# Altium PCB ControlUnit.PcbDoc (part 1 of 2)
Units mm, origin at the board's own origin, x right, y up, seen from the top; angles counter-clockwise.
Board outline 168.75 x 59.75 mm, 4 copper layers (Top Layer, GND, VCC, Bottom Layer), stack 1.536 mm thick; 143 components, 128 nets, 538 pads, 141 vias.
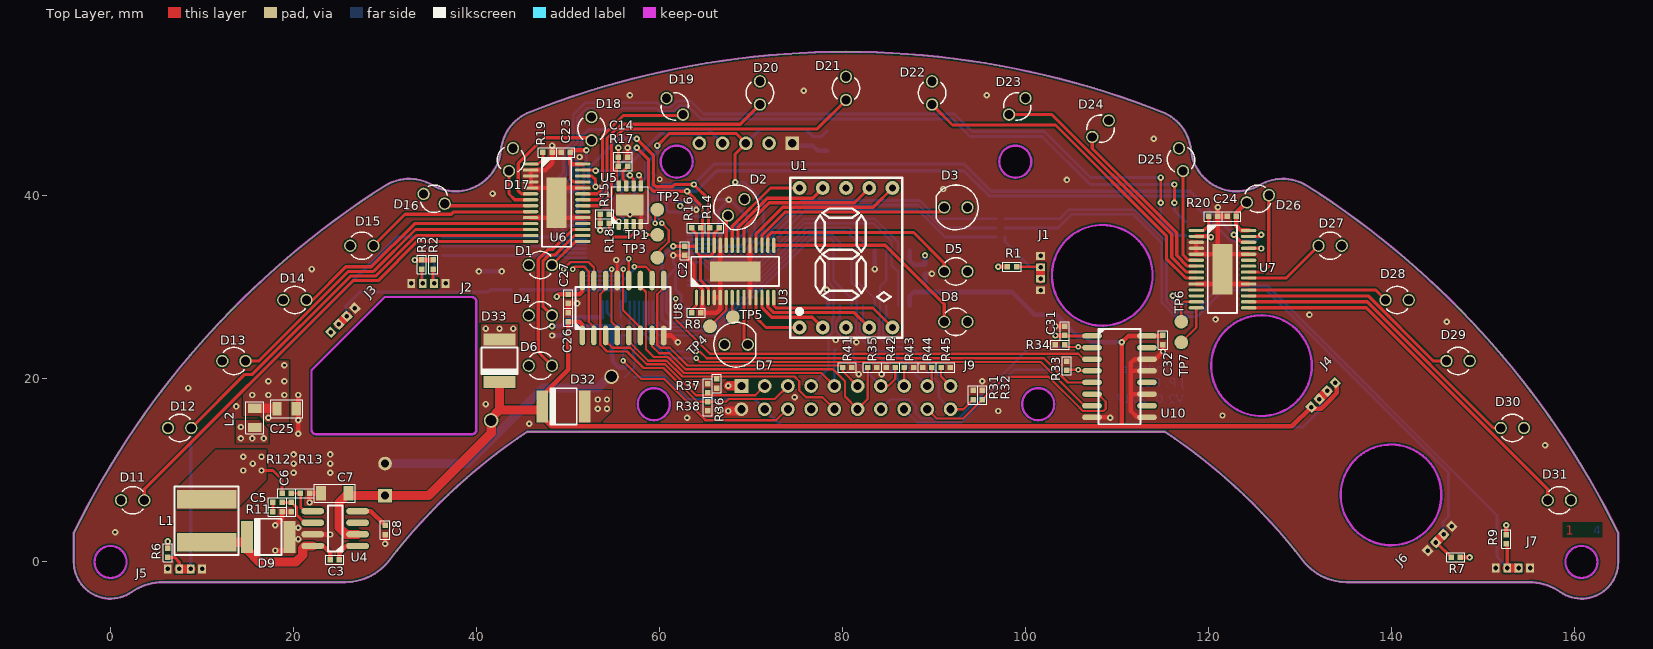
[diagram p0: Top Layer view]
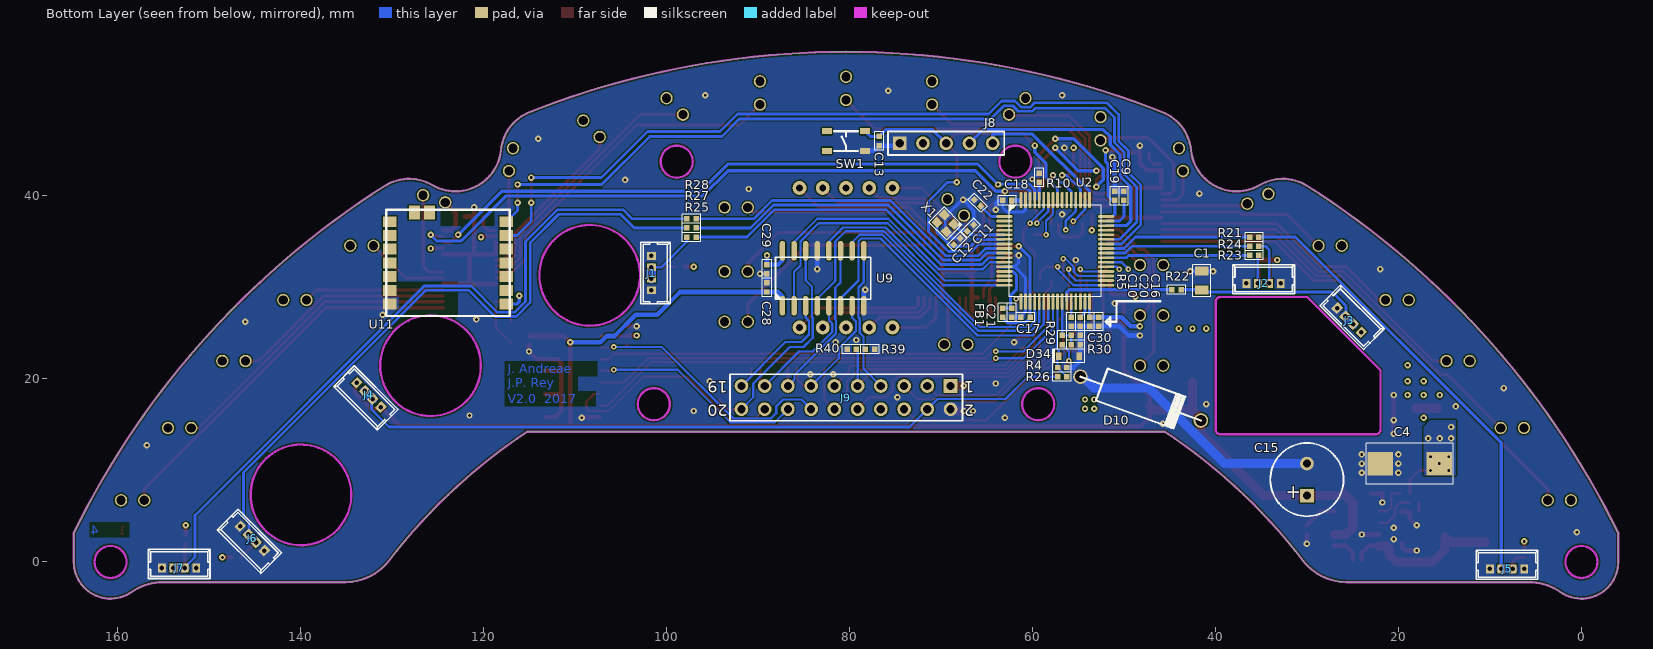
[diagram p1: Bottom Layer view, seen from below]
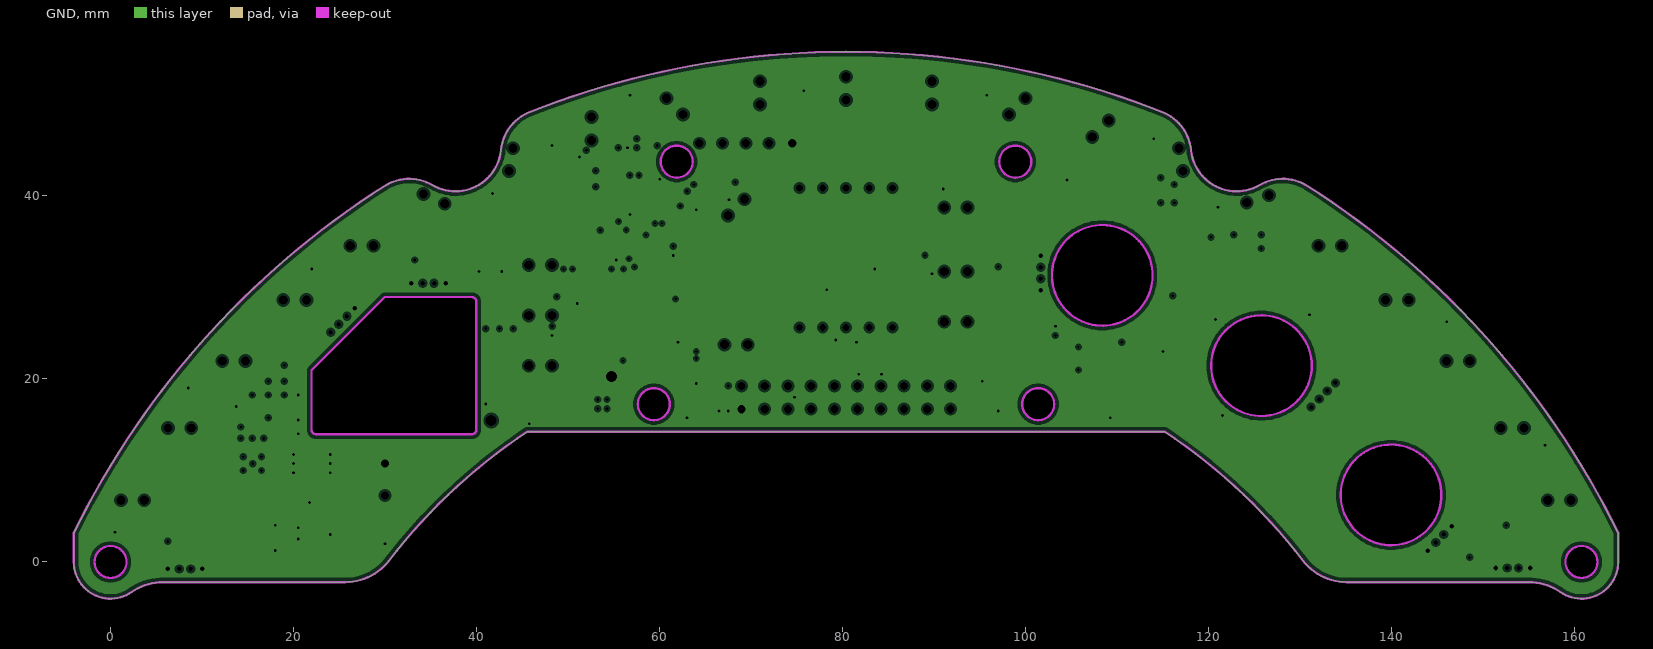
[diagram p2: GND, clearances drawn from the general rule]
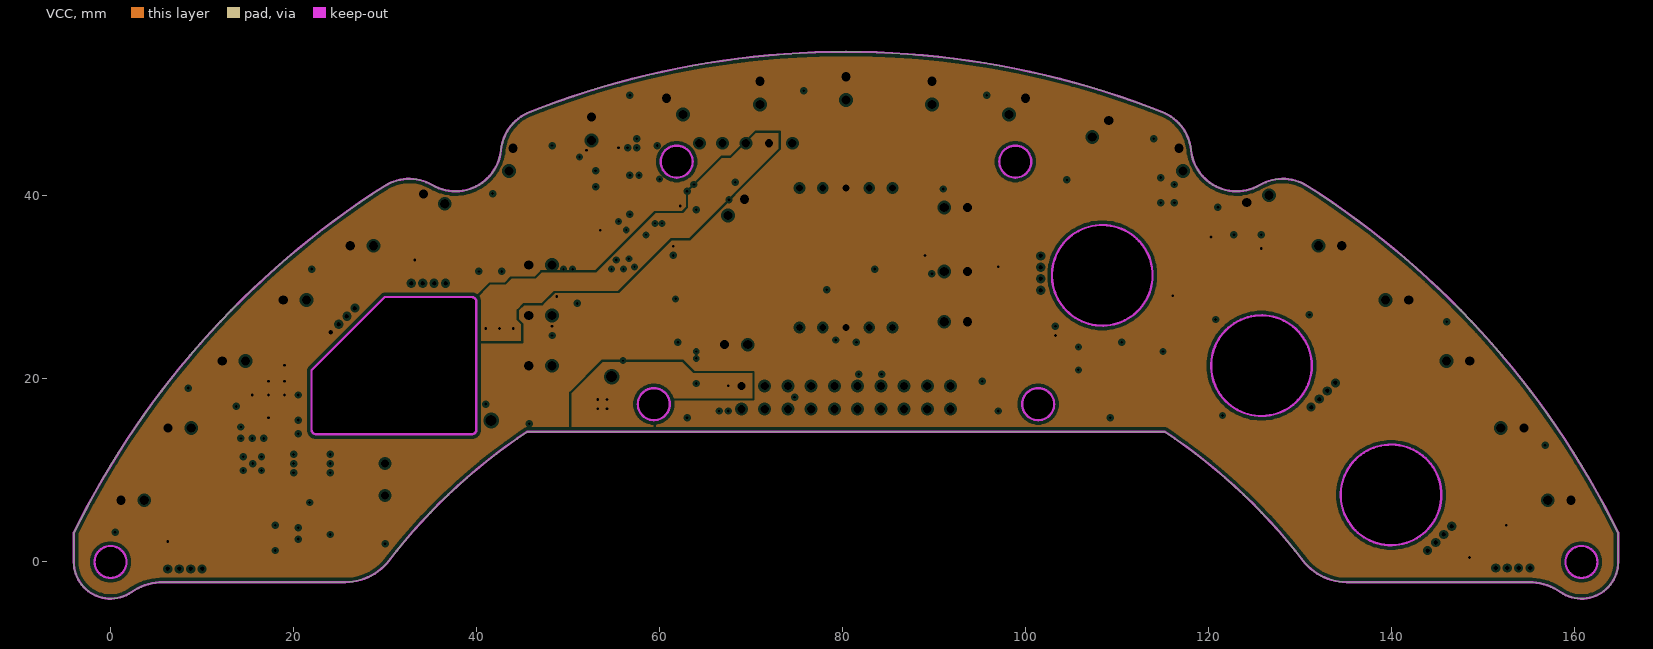
[diagram p3: VCC, clearances drawn from the general rule]
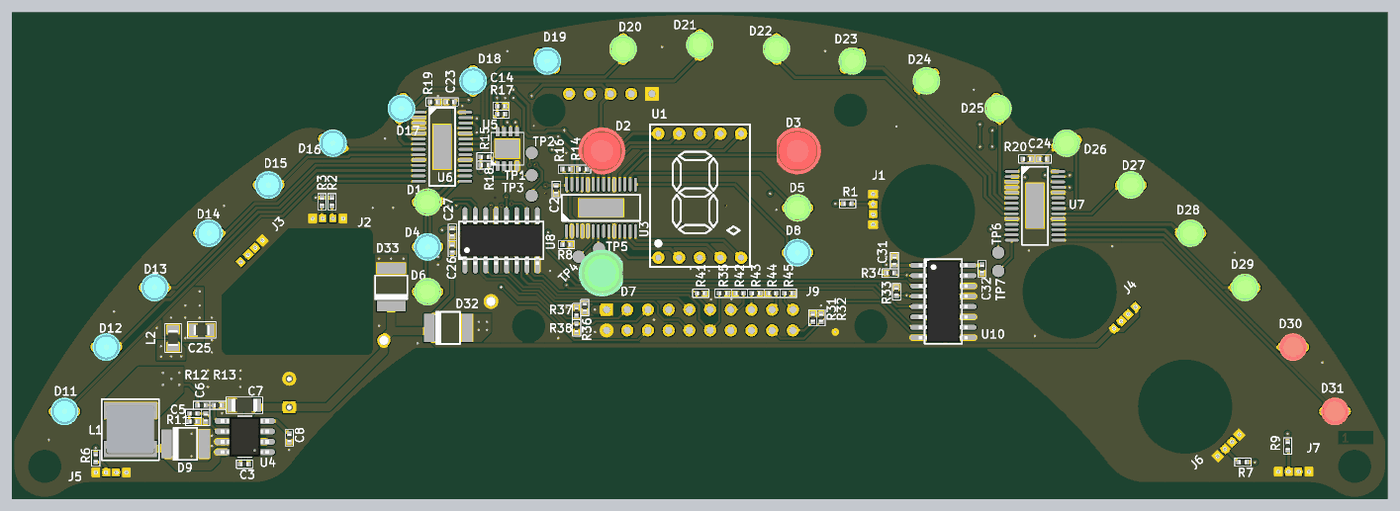
[diagram p5: 3D render of the assembled board from above, using the file's embedded part models]
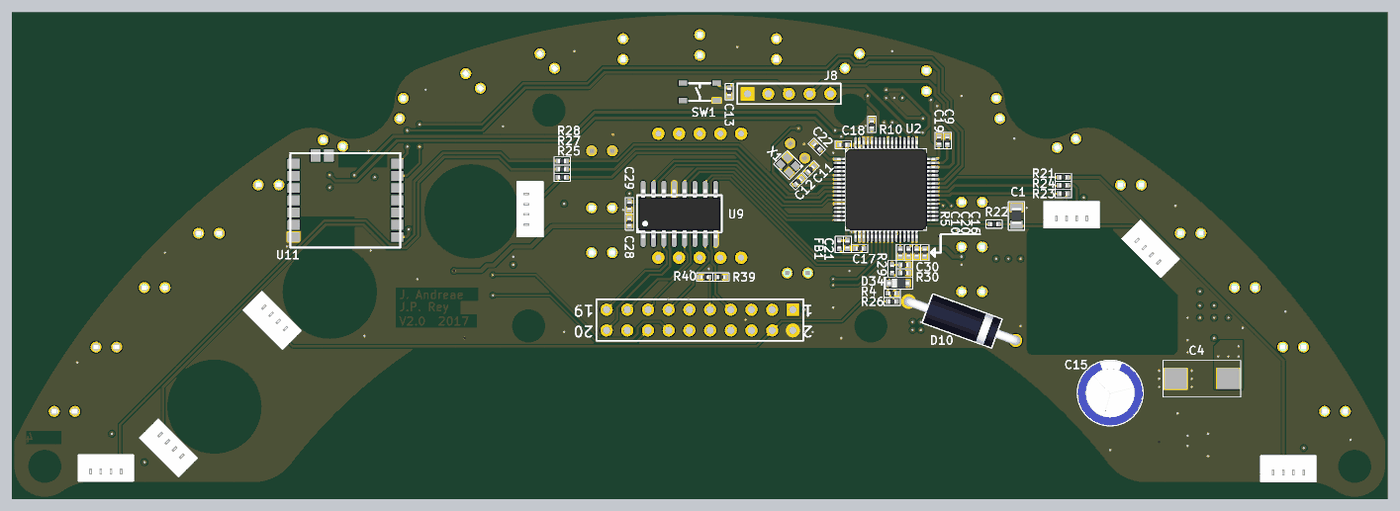
[diagram p6: 3D render of the assembled board from below, using the file's embedded part models]

## Layer stack, top to bottom
Top Solder: solder mask 0.0102, Solder Resist, Dk 3.5
Top Layer: signal copper 0.018
Dielectric1: prepreg 0.36, FR-4, Dk 4.2
GND: plane copper 0.035, net GND
Dielectric 4: core 0.71, Dk 4.2
VCC: plane copper 0.035, net (Multiple Nets)
Dielectric3: prepreg 0.36, FR-4, Dk 4.2
Bottom Layer: signal copper 0.018
Bottom Solder: solder mask 0.0102, Solder Resist, Dk 3.5

## Board outline
-4.011,0 ccw(c0,0) 2.299,-3.286 cw(c5.739,-8.203) 5.739,-2.203 25.661,-2.203 ccw(c25.661,3.797) 30.418,0.141 cw(c80.365,-38.256) 45.54,14.244 115.189,14.244 cw(c80.365,-38.256) 130.312,0.141 ccw(c135.069,3.797) 135.069,-2.203 154.991,-2.203 cw(c154.991,-8.203) 158.431,-3.286 ccw(c160.73,0) 164.74,0 164.74,3.178 ccw(c80.365,-38.256) 130.77,41.088 ccw(c128.089,36.867) 125.564,41.183 cw(c123.04,45.499) 118.064,45.004 ccw(c113.089,44.51) 114.927,49.16 ccw(c80.365,-38.256) 80.365,55.744 ccw(c80.365,-38.256) 45.802,49.16 ccw(c47.641,44.51) 42.665,45.004 cw(c37.69,45.499) 35.165,41.183 ccw(c32.641,36.867) 29.96,41.088 ccw(c80.365,-38.256) -4.011,3.178
cut-out: 57.615,17.244 ccw(c59.365,17.244) 59.365,15.494 ccw(c59.365,17.244) 61.115,17.244 ccw(c59.365,17.244) 59.365,18.994 ccw(c59.365,17.244)
cut-out: 61.865,41.994 cw(c61.865,43.744) 60.115,43.744 cw(c61.865,43.744) 61.865,45.494 cw(c61.865,43.744) 63.615,43.744 cw(c61.865,43.744)
cut-out: 97.115,43.744 ccw(c98.865,43.744) 98.865,41.994 ccw(c98.865,43.744) 100.615,43.744 ccw(c98.865,43.744) 98.865,45.494 ccw(c98.865,43.744)
cut-out: 99.615,17.244 ccw(c101.365,17.244) 101.365,15.494 ccw(c101.365,17.244) 103.115,17.244 ccw(c101.365,17.244) 101.365,18.994 ccw(c101.365,17.244)
cut-out: 102.865,31.322 ccw(c108.365,31.322) 108.365,25.822 ccw(c108.365,31.322) 113.865,31.322 ccw(c108.365,31.322) 108.365,36.822 ccw(c108.365,31.322)
cut-out: 120.258,21.448 ccw(c125.758,21.448) 125.758,15.948 ccw(c125.758,21.448) 131.258,21.448 ccw(c125.758,21.448) 125.758,26.948 ccw(c125.758,21.448)
cut-out: 134.422,7.328 ccw(c139.922,7.328) 139.922,1.828 ccw(c139.922,7.328) 145.422,7.328 ccw(c139.922,7.328) 139.922,12.828 ccw(c139.922,7.328)
cut-out: 158.98,0 ccw(c160.73,0) 160.73,-1.75 ccw(c160.73,0) 162.48,0 ccw(c160.73,0) 160.73,1.75 ccw(c160.73,0)
cut-out: 0,-1.75 cw(c0,0) -1.75,0 cw(c0,0) 0,1.75 cw(c0,0) 1.75,0 cw(c0,0)
cut-out: 22.472,13.948 cw(c22.472,14.448) 21.972,14.448 21.972,20.948 29.972,28.948 39.472,28.948 cw(c39.472,28.448) 39.972,28.448 39.972,14.448 cw(c39.472,14.448) 39.472,13.948

## Design rules (kind name [scope] priority, off if disabled: settings)
Clearance Clearance_1 [InNetClass('HV_NET') vs not InNetClass('HV_NET')] p1: gap=1.9 ignorepadtopadclearanceinfootprint=FALSE except(0: Arc-Hole Track-Hole SMDPad-Hole THPad-Hole Via-Hole Fill-Hole Poly-Hole Region-Hole Text-Hole)
Clearance [All] p2: gap=0.15 ignorepadtopadclearanceinfootprint=FALSE except(0: Arc-Hole Track-Hole SMDPad-Hole THPad-Hole Via-Hole Fill-Hole Poly-Hole Region-Hole Text-Hole)
ComponentClearance [All] p1: gap=0.05 collisioncheckmode=3 verticalgap=0.05 showdistances=FALSE
FabricationTestPointUsage TestPointUsage [All] p1: valid=0 allowmultiple=FALSE
FabricationTestpoint Testpoint [All] p1: side=3 testpointundercomponent=TRUE minsize=1.016 maxsize=2.54 preferedsize=1.524 minholesize=0 maxholesize=1.016 preferedholesize=0.813 testpointgrid=0.025 allowsidetop=TRUE allowsidebottom=TRUE usegrid=TRUE gridtolerance=0
Height [All] p1: minheight=0 maxheight=30 prefheight=12.7
HoleSize [All] p1: absolutevalues=TRUE maxlimit=5 minlimit=0.15 maxpercent=80.000 minpercent=20.000
HoleToHoleClearance [All] p1: gap=0.3 allowstackedmicrovias=TRUE
MatchedLengths [All] p1: tolerance=1.5 checknetsindiffpair=TRUE checkdiffpairvsdiffpair=FALSE checkxsignals=FALSE checkothers=FALSE
MaxMinImpedance [InNetClass('50ohm_line')] p1: minimum=40.00 maximum=60.00
MinimumSolderMaskSliver [All] p1: minsoldermaskwidth=0.01
NetAntennae [All] p1 off: netantennaetolerance=0
PlaneClearance [All] p1: clearance=0.254
PlaneConnect [All] p1: planeconnectstyle=Direct reliefexpansion=0.508 reliefentries=4 reliefconductorwidth=0.254 reliefairgap=0.254
PolygonConnect no_thermal_relief [IsNamedPolygon('NO_THERM_PLANE')] p1: connectstyle=Direct reliefconductorwidth=0.2 reliefentries=4 polygonreliefangle="90 Angle" airgapwidth=0.1
PolygonConnect [All] p2: connectstyle=Relief reliefconductorwidth=0.2 reliefentries=4 polygonreliefangle="90 Angle" airgapwidth=0.1
RoutingVias [All] p1: holewidth=0.3 width=0.7 viastyle="Through Hole" minholewidth=0.15 minwidth=0.35 maxholewidth=5 maxwidth=7
SilkToBoardRegionClearance [All] p1 off:
SilkToSilkClearance [All] p1 off: silktosilkclearance=0.254
SilkToSolderMaskClearance SilkscreenOverComponentPads [IsPad] p1 off: minsilkscreentomaskgap=0.254 clearancetoexposedcopper=TRUE
SolderMaskExpansion [All] p1: expansion=0.102
Width [All] p1: maxlimit=10 minlimit=0.2 preferedwidth=0.3
17 further rules are at their usual default settings.

## Classes and differential pairs
component class U_MCU: C1 C2 C3 C4 C5 C6 C7 C8 C9 C10 C11 C12 C13 C14 C15 C16 C17 C18 C19 C20 C21 C22 C25 C26 C27 C28 C29 C30 C31 C32 D1 D2 D3 D4 D5 D6 D7 D8 D9 D10 D32 D33 D34 FB1 J1 J2 J3 J4 J5 J6 J7 J8 J9 L1 L2 R1 R2 R3 R4 R5 R6 R7 R8 R9 R10 R11 R12 R13 R14 R15 R16 R17 R18 R21 R22 R23 R24 R25 R26 R27 R28 R29 R30 R31 R32 R33 R34 R35 R36 R37 R38 R39 R40 R41 R42 R43 R44 R45 SW1 TP1 TP2 TP3 TP4 TP5 U1 U2 U3 U4 U5 U8 U9 U10 U11 X1
component class U_LEDs: C23 C24 D11 D12 D13 D14 D15 D16 D17 D18 D19 D20 D21 D22 D23 D24 D25 D26 D27 D28 D29 D30 D31 R19 R20 TP6 TP7 U6 U7

## Components (designator, comment, footprint, x,y, rotation, side; value= is the part's Value field where it differs from the comment)
C1 "22u" 0805_ 41.5,30.75 r180 bottom
C2 "100n" 0402_ 62.75,34 r180 top
C3 "100n" 0402_ 24.5,0.25 r270 top
C4 "C" 2917 18.75,10.75 r0 bottom value=470u
C5 "C" 0402_ 18.25,6.5 r90 top value=220pF
C6 "C" 0402_ 19.75,6 r180 top value=220pF
C7 "10u" 1206_ 24.5,7.5 r0 top
C8 "100n" 0402_ 30,3.5 r180 top
C9 "2u2" 0402_ 50,40 r0 bottom
C10 "2u2" 0402_ 54.75,26.25 r180 bottom
C11 "18p" 0402_ 66.75,36.5 r45 bottom
C12 "18p" 0402_ 68.25,35 r45 bottom
C13 "100n" 0402_ 76.75,46 r0 bottom
C14 "100n" 0402_ 56,44.25 r270 top
C15 "C_pol" C_pol8x12mm 30,7.25 r0 bottom value=100u
C16 "4u7" 0402_ 52.75,26.25 r0 bottom
C17 "100n" 0402_ 60.75,26.75 r90 bottom
C18 "100n" 0402_ 62.75,39.5 r90 bottom
C19 "100n" 0402_ 51,40 r180 bottom
C20 "100n" 0402_ 53.75,26.25 r0 bottom
C21 "100n" 0402_ 62.25,27.25 r0 bottom
C22 "100n" 0402_ 66,39.25 r135 bottom
C23 "100n" 0402_ 49.75,44.75 r90 top
C24 "100n" 0402_ 122.5,37.75 r90 top
C25 "22u" 0805_ 19.25,16.75 r270 top
C26 "100n" 0402_ 50,26.75 r180 top
C27 "100n" 0402_ 50,28.75 r180 top
C28 "100n" 0402_ 89,30 r0 bottom
C29 "100n" 0402_ 89,32 r0 bottom
C30 "4u7" 0402_ 55.25,24.75 r270 bottom
C31 "100n" 0402_ 104.25,25.25 r180 top
C32 "100n" 0402_ 115,24.25 r180 top
D1 "led" LED3MM_GREEN 46.972,32.448 r0 top locked
D2 "led" LED5MM_RED 68.365,38.744 r225 top locked
D3 "led" LED5MM_RED 92.365,38.744 r180 top locked
D4 "led" LED3MM_BLUE 46.972,26.948 r0 top locked
D5 "led" LED3MM_GREEN 92.365,31.744 r180 top locked
D6 "led" LED3MM_GREEN 46.972,21.448 r0 top locked
D7 "led" LED5MM_GREEN 68.365,23.744 r0 top locked
D8 "led" LED3MM_BLUE 92.365,26.244 r180 top locked
D9 "STPS3L40" SMB_FLAT 17.25,2.75 r180 top
D10 "Zener" 1N5354 54.75,20.25 r200 bottom
D11 "led" LED3MM_BLUE 2.423,6.742 r0 top locked
D12 "led" LED3MM_BLUE 7.553,14.643 r0 top locked
D13 "led" LED3MM_BLUE 13.482,21.962 r0 top locked
D14 "led" LED3MM_BLUE 20.143,28.625 r0 top locked
D15 "led" LED3MM_BLUE 27.464,34.554 r0 top locked
D16 "led" LED3MM_BLUE 35.365,39.685 r335 top locked
D17 "led" LED3MM_BLUE 43.759,43.961 r260 top locked
D18 "led" LED3MM_BLUE 52.553,47.339 r270 top locked
D19 "led" LED3MM_BLUE 61.653,49.778 r315 top locked
D20 "led" LED3MM_GREEN 70.957,51.251 r270 top locked
D21 "led" LED3MM_GREEN 80.365,51.744 r270 top locked
D22 "led" LED3MM_GREEN 89.772,51.251 r270 top locked
D23 "led" LED3MM_GREEN 99.077,49.778 r225 top locked
D24 "led" LED3MM_GREEN 108.176,47.339 r225 top locked
D25 "led" LED3MM_GREEN 116.971,43.963 r280 top locked
D26 "led" LED3MM_GREEN 125.365,39.687 r18 top locked
D27 "led" LED3MM_GREEN 133.266,34.554 r180 top locked
D28 "led" LED3MM_GREEN 140.587,28.627 r180 top locked
D29 "led" LED3MM_GREEN 147.248,21.964 r180 top locked
D30 "led" LED3MM_RED 153.176,14.643 r180 top locked
D31 "led" LED3MM_RED 158.307,6.744 r180 top locked
D32 "STPS3L40" SMB_FLAT 49.5,17 r180 top
D33 "STPS3L40" SMB_FLAT 42.5,22 r270 top
D34 "BZX384-C3V0" SOD323 56,22.5 r90 bottom
FB1 "FB" 0402_ 63.25,27.25 r180 bottom
J1 "MOLEX_embase_4_voies" MOLEX53047-0410 101.635,29.694 r90 bottom locked
J2 "MOLEX_embase_4_voies" MOLEX53047-0410 32.86,30.444 r0 bottom locked
J3 "MOLEX_embase_4_voies" MOLEX53047-0410 24.058,25.093 r45 bottom locked
J4 "MOLEX_embase_4_voies" MOLEX53047-0410 133.837,19.571 r225 bottom locked
J5 "MOLEX_embase_4_voies" MOLEX53047-0410 6.26,-0.756 r0 bottom
J6 "MOLEX_embase_4_voies" MOLEX53047-0410 146.562,3.896 r225 bottom locked
J7 "MOLEX_embase_4_voies" MOLEX53047-0410 151.36,-0.656 r0 bottom locked
J8 "Header 5" HDR1X5 74.5,45.75 r180 bottom value="SWD Port"
J9 "Header 10X2" header2x10 80.365,17.964 r0 bottom locked
L1 "L" SRN6028 10.5,4.5 r90 top value=15uH
L2 "Inductor" 0805_ 15.75,15.75 r0 top value=1u
R1 "1k" 0402_ 98.5,32.25 r90 top
R2 "1k" 0402_ 35.25,32.5 r0 top
R3 "1k" 0402_ 34,32.5 r0 top
R4 "3k3" 0402_ 56.75,21.25 r90 bottom
R5 "10k" 0402_ 55.75,26.25 r0 bottom
R6 "1k" 0402_ 6.25,1 r180 top
R7 "1k" 0402_ 147,0.5 r270 top
R8 "3k" 0402_ 64,27.25 r90 top
R9 "1k" 0402_ 152.5,2.5 r0 top
R10 "10k" 0402_ 59.25,42 r180 bottom
R11 "27k" 0402_ 18.25,5.5 r270 top
R12 "10k" 0402_ 19.25,7.5 r90 top
R13 "3k3" 0402_ 21.25,7.5 r90 top
R14 "10k" 0402_ 66,36.5 r90 top
R15 "10k" 0402_ 54,38 r270 top
R16 "10k" 0402_ 64,36.5 r270 top
R17 "10k" 0402_ 56,43.25 r270 top
R18 "10k" 0402_ 54,37 r270 top
R19 "3k" 0402_ 47.75,44.75 r90 top
R20 "3k" 0402_ 120.5,37.75 r90 top
R21 "330R" 0402_ 35.75,35.5 r90 bottom
R22 "330R" 0402_ 44.25,29.75 r270 bottom
R23 "330R" 0402_ 35.75,33.5 r90 bottom
R24 "330R" 0402_ 35.75,34.5 r90 bottom
R25 "330R" 0402_ 97.25,35.5 r270 bottom
R26 "8k2" 0402_ 56.75,20.25 r90 bottom
R27 "330R" 0402_ 97.25,36.5 r270 bottom
R28 "330R" 0402_ 97.25,37.5 r270 bottom
R29 "1k8" 0402_ 56.75,24.25 r180 bottom
R30 "3k3" 0402_ 55.25,23.75 r270 bottom
R31 "10k" 0402_ 94.25,18.25 r180 top
R32 "10k" 0402_ 95.25,18.25 r180 top
R33 "10k" 0402_ 104.5,21.448 r180 top
R34 "10k" 0402_ 103.75,23.75 r270 top
R35 "10k" 0402_ 83.25,21.25 r90 top
R36 "10k" 0402_ 66.25,19.5 r0 top
R37 "10k" 0402_ 65.25,19 r180 top
R38 "10k" 0402_ 65.25,17 r0 top
R39 "10k" 0402_ 77.75,23.25 r90 bottom
R40 "10k" 0402_ 79.75,23.25 r270 bottom
R41 "10k" 0402_ 80.5,21.25 r90 top
R42 "10k" 0402_ 85.25,21.25 r270 top
R43 "10k" 0402_ 87.25,21.25 r90 top
R44 "10k" 0402_ 89.25,21.25 r270 top
R45 "10k" 0402_ 91.25,21.25 r90 top
SW1 "switch" microswitch_PTS810 80.365,46 r180 bottom
TP1 "TP" TP_PogoPin 59.75,35.75 r0 top
TP2 "TP" TP_PogoPin 59.75,38.5 r90 top
TP3 "TP" TP_PogoPin 59.75,33.25 r90 top
TP4 "TP" TP_PogoPin 65.5,25.75 r90 top
TP5 "TP" TP_PogoPin 68,26.75 r90 top
TP6 "TP" TP_PogoPin 117,26.25 r90 top
TP7 "TP" TP_PogoPin 117,24 r90 top
U1 "TDSR1350" TDSR1350 80.365,33.244 r0 top locked
U2 "STM32F205RxT" LQFP64 57.5,34 r180 bottom
U3 "PCA9952TW/Q900" HTSSOP28 68.25,31.75 r90 top
U4 "TPS54233" soic8 27,1.75 r180 top
U5 "MX25L1606E" USON_8L 56.75,39 r90 top
U6 "PCA9952TW/Q900" HTSSOP28 48.75,39.25 r0 top
U7 "PCA9952TW/Q900" HTSSOP28 121.5,32 r0 top
U8 "MC14504B" SOIC16 56,27.75 r90 top
U9 "MC14504B" SOIC16 82.865,31 r90 bottom
U10 "MC14504B" SOIC16 110.25,20.25 r0 top
U11 "SPBT2632C2A" SPBT2632C2A 123.85,32.675 r270 bottom
X1 "QUARTZ" FA_128 69.5,37 r45 bottom value=25MHz

## Footprints (in the part's own frame and the unit in brackets; to place one, negate y for a bottom-side part, rotate by r counter-clockwise, add the part's x,y. Pads: shape width x height; smd on the part's side, far side on the other; paste and mask are expansions set on the pad)
1N5354 [mm]
  round 1.6 hole 1.2: 1(0,0) 2(14,0)
  silkscreen extent 0,-1.85 14,1.85, body extent -0.54,-1.84 14.55,1.85, height 3.83
0402_ [mm] "SMD 0402 package, 0.6x1.5mm"
  rect 0.6x0.6 smd: 1(0,-0.5) 2(0,0.5)
  silkscreen extent -0.5,-1 0.5,1, body extent -0.25,-0.5 0.25,0.5, height 0.6
0805_ [mm] "standard 0805 FP"
  rect 1.5x1 smd: 1(0,-1.05) 2(0,1.05)
  silkscreen extent -1,-1.75 1,1.75, body extent -0.62,-1 0.63,1, height 1.2
1206_ [mm] "1206 1.6x3.2mm"
  rect 1.1x1.6 smd: 1(-1.5,0) 2(1.5,0)
  silkscreen extent -2.25,-1 2.25,1, body extent -1.6,-0.8 1.6,0.8, height 1.5
2917 [mm] "2917 7.3x4.3mm"
  rect 2.77x2.55 smd: 1(-3.22,0) 2(3.22,0)
  silkscreen extent -4.75,-2.25 4.75,2.25, body extent -3.65,-2.15 3.65,2.15, height 4.3
C_pol8x12mm [mm] "radial, diam 8mm, height 12mm"
  rect 1.5x1.5 hole 0.9: 1(0,0)
  round 1.5 hole 0.9: 2(0,-3.5)
  silkscreen extent -4,-5.75 4,2.25, body extent -4,-5.75 4,2.25, height 12
FA_128 [mm] "Crystal Unit Ultra Miniature Size Low Profile SMD MHz range"
  rect 0.95x0.85 smd: 1(-0.725,-0.575) 2(0.725,-0.575) 3(0.725,0.575) 4(-0.725,0.575)
  silkscreen extent -1.38,-1.18 1.38,1.18, body extent -1,-0.8 1,0.8, height 0.5
HDR1X5 [mm] "Connector; Header; 5 Position"
  rect 1.5x1.5 hole 0.9: 1(0,0)
  round 1.5 hole 0.9: 2(2.54,0) 3(5.08,0) 4(7.62,0) 5(10.16,0)
  silkscreen extent -1.27,-1.27 11.43,1.27
header2x10 [mm] "header 2x10 pins, path 2.54mm"
  rect 1.5x1.5 hole 0.9: 1(-11.43,-1.27)
  round 1.5 hole 0.9: 2(-11.43,1.27) 3(-8.89,-1.27) 4(-8.89,1.27) 5(-6.35,-1.27) 6(-6.35,1.27) 7(-3.81,-1.27) 8(-3.81,1.27) 9(-1.27,-1.27) 10(-1.27,1.27) 11(1.27,-1.27) 12(1.27,1.27) 13(3.81,-1.27) 14(3.81,1.27) 15(6.35,-1.27) 16(6.35,1.27) 17(8.89,-1.27) 18(8.89,1.27) 19(11.43,-1.27) 20(11.43,1.27)
  silkscreen extent -12.73,-2.54 12.67,2.54, body extent -16.5,-4.5 16.5,4.5, height 10
HTSSOP28 [mm] "TSOP, 128-Leads, Body 9.7x4.4mm, Pitch 0.65mm, IPC Medium Density"
  oval 1.7x0.35 smd: 1(-2.85,4.225) 2(-2.85,3.575) 3(-2.85,2.925) 4(-2.85,2.275) 5(-2.85,1.625) 6(-2.85,0.975) 7(-2.85,0.325) 8(-2.85,-0.325) 9(-2.85,-0.975) 10(-2.85,-1.625) 11(-2.85,-2.275) 12(-2.85,-2.925) 13(-2.85,-3.575) 14(-2.85,-4.225) 15(2.85,-4.225) 16(2.85,-3.575) 17(2.85,-2.925) 18(2.85,-2.275) 19(2.85,-1.625) 20(2.85,-0.975) 21(2.85,-0.325) 22(2.85,0.325) 23(2.85,0.975) 24(2.85,1.625) 25(2.85,2.275) 26(2.85,2.925) 27(2.85,3.575) 28(2.85,4.225)
  rect 2.2x5.5 smd: 10(0,0)
  silkscreen extent -1.6,-4.8 1.6,4.8, body extent -2.2,-4.85 2.2,4.85, height 1.2
LED3MM_BLUE [mm]
  round 1.35 hole 1: 1(-1.27,0) 2(1.27,0)
  silkscreen extent -1.15,-1.5 1.15,1.5, body extent -1.7,-1.7 1.7,1.7, height 8.64
LED3MM_GREEN [mm]
  round 1.35 hole 1: 1(-1.27,0) 2(1.27,0)
  silkscreen extent -1.15,-1.5 1.15,1.5, body extent -1.7,-1.7 1.7,1.7, height 8.64
LED3MM_RED [mm]
  round 1.35 hole 1: 1(-1.27,0) 2(1.27,0)
  silkscreen extent -1.15,-1.5 1.15,1.5, body extent -1.7,-1.7 1.7,1.7, height 8.64
LED5MM_GREEN [mm]
  round 1.35 hole 1: 1(-1.27,0) 2(1.27,0)
  silkscreen extent -2.44,-2.45 2.13,2.45, body extent -2.9,-2.9 2.55,2.9, height 12.44
LED5MM_RED [mm]
  round 1.35 hole 1: 1(-1.27,0) 2(1.27,0)
  silkscreen extent -2.44,-2.45 2.13,2.45, body extent -2.9,-2.9 2.55,2.9, height 12.44
LQFP64 [mm] "Thin QFP, 64-Leads, Body 10x10mm, Pitch 0.5mm, IPC Medium Density"
  oval 1.8x0.3 smd: 1(-5.55,3.75) 2(-5.55,3.25) 3(-5.55,2.75) 4(-5.55,2.25) 5(-5.55,1.75) 6(-5.55,1.25) 7(-5.55,0.75) 8(-5.55,0.25) 9(-5.55,-0.25) 10(-5.55,-0.75) 11(-5.55,-1.25) 12(-5.55,-1.75) 13(-5.55,-2.25) 14(-5.55,-2.75) 15(-5.55,-3.25) 16(-5.55,-3.75) 33(5.55,-3.75) 34(5.55,-3.25) 35(5.55,-2.75) 36(5.55,-2.25) 37(5.55,-1.75) 38(5.55,-1.25) 39(5.55,-0.75) 40(5.55,-0.25) 41(5.55,0.25) 42(5.55,0.75) 43(5.55,1.25) 44(5.55,1.75) 45(5.55,2.25) 46(5.55,2.75) 47(5.55,3.25) 48(5.55,3.75)
  oval 0.3x1.8 smd: 17(-3.75,-5.55) 18(-3.25,-5.55) 19(-2.75,-5.55) 20(-2.25,-5.55) 21(-1.75,-5.55) 22(-1.25,-5.55) 23(-0.75,-5.55) 24(-0.25,-5.55) 25(0.25,-5.55) 26(0.75,-5.55) 27(1.25,-5.55) 28(1.75,-5.55) 29(2.25,-5.55) 30(2.75,-5.55) 31(3.25,-5.55) 32(3.75,-5.55) 49(3.75,5.55) 50(3.25,5.55) 51(2.75,5.55) 52(2.25,5.55) 53(1.75,5.55) 54(1.25,5.55) 55(0.75,5.55) 56(0.25,5.55) 57(-0.25,5.55) 58(-0.75,5.55) 59(-1.25,5.55) 60(-1.75,5.55) 61(-2.25,5.55) 62(-2.75,5.55) 63(-3.25,5.55) 64(-3.75,5.55)
  silkscreen extent -5,-5 5,5, body extent -6,-6 6,6, height 1.6
microswitch_PTS810 [mm] "subminiature tact switch for SMT, case 4.6x3.2mm, total 5.2x3.2mm"
  rect 1.05x0.65 smd: 1(-2.075,1.075) 2(2.075,1.075) 3(-2.075,-1.075) 4(2.075,-1.075)
  silkscreen extent -1.3,-1.1 1.3,1.05, body extent -2.3,-1.6 2.3,1.6, height 2.5
MOLEX53047-0410 [mm] "EMBASE DROITE 4 VOIES"
  rect 0.85x1 hole 0.5: 1(3.75,0) 2(2.5,0) 3(1.25,0) 4(0,0)
  silkscreen extent -1.5,-2.05 5.25,1.15, body extent -1.5,-2.06 5.25,1.14, height 4.25
SMB_FLAT [mm] "SMB flat ST ECOPACK footprint, case 3.95x4.6mm"
  rect 1.3x3.5 smd: 1(-2.32,0) 2(2.32,0)
  silkscreen extent -1.45,-1.97 1.45,1.97, body extent -2.8,-1.97 2.8,1.97, height 1
SOD323 [mm] "SOD323F 1.8x1.35mm, total legth 2.7mm, lead width 0.4mm"
  rect 0.83x0.63 smd: 1(0,-1.11) 2(0,1.11)
  silkscreen extent -0.75,-1.75 0.75,1.75, body extent -0.68,-1.35 0.67,1.35, height 0.79
soic8 [mm] "soic8 CMS 8 leads, pitch 1.27mm"
  oval 2.5x0.7 smd: 1(0,0) 2(0,-1.27) 3(0,-2.54) 4(0,-3.81) 5(4.9,-3.81) 6(4.9,-2.54) 7(4.9,-1.27) 8(4.9,0)
  silkscreen extent 1.65,-4.41 3.25,0.6, body extent -0.55,-4.35 5.45,0.55, height 1.71
SOIC16 [mm] "case 10.3x4.55mm pitch 1.27mm 16 leads"
  oval 2.15x0.6 smd: 1(-3,4.445) 2(-3,3.175) 3(-3,1.905) 4(-3,0.635) 5(-3,-0.635) 6(-3,-1.905) 7(-3,-3.175) 8(-3,-4.445) 9(3,-4.445) 10(3,-3.175) 11(3,-1.905) 12(3,-0.635) 13(3,0.635) 14(3,1.905) 15(3,3.175) 16(3,4.445)
  silkscreen extent -2.3,-5.2 2.3,5.2, body extent -3,-5 3,5, height 1.76
SPBT2632C2A [mm] "ST Micro mini Bluetooth Module"
  rect 1.2x1.5 smd: 1(-4.5,-6.37) 2(-3,-6.37) 3(-1.5,-6.37) 4(0,-6.37) 5(1.5,-6.37) 6(3,-6.37) 7(4.5,-6.37) 8(4.5,6.37) 9(3,6.37) 10(1.5,6.37) 11(0,6.37) 12(-1.5,6.37) 13(-3,6.37) 14(-4.5,6.37)
  rect 1.5x1.2 smd: 15(-5.5,-2.02) 16(-5.5,-3.67)
  Top Layer pour cut-out: 2,-5.37 6,-5.37 6,1.13 2,1.13
  Top Layer pour cut-out: -6,-0.87 -4,-0.87 -4,5.13 -6,5.13
  silkscreen extent -5.8,-6.75 5.8,6.75, body extent -6.11,-6.98 5.7,6.98, height 2.9
SRN6028 [mm] "Bourns Unshielded Wirewound Inductor"
  rect 2x6.5 smd: 1(-2.35,0) 2(2.35,0)
  silkscreen extent -3.75,-3.5 3.75,3.5, body extent -3,-3 3,3, height 2.9
TDSR1350 [mil] "Common Anode 7 seg led display"
  round 60 hole 30: 1(-200,-300) 2(-100,-300) 3(0,-300) 4(100,-300) 5(200,-300) 6(200,300) 7(100,300) 8(0,300) 9(-100,300) 10(-200,300)
  silkscreen extent -240,-344 242,345, body extent -239,-344 243,345, height 276
TP_PogoPin [mm] "Test point for Pogo pin contact"
  round 1.5 smd: 1(0,0)
  body extent -0.74,-0.75 0.75,0.75, height 0
USON_8L [mm] "USON 8L 4x4x0.6mm, LEAD PITCH 0.8MM"
  rrect50% 1.2x0.5 smd: 1(-2.1,1.2) 2(-2.1,0.4) 3(-2.1,-0.4) 4(-2.1,-1.2) 5(2.1,-1.2) 6(2.1,-0.4) 7(2.1,0.4) 8(2.1,1.2)
  rect 2.3x3 smd: 9(0,0)
  silkscreen extent -2,-2 2,2, body extent -2.02,-2 2.02,2, height 0.6

## Part data
C1 C25: library part C, Manufacturer=Murata, Manufacturer PartNum=GRM21BR61A226ME51L, rated voltage=10V, Digikey ref=490-10511-1-ND
C2 C3 C8 C13 C14 C17 C18 C19 C20 C21 C22 C23 C24 C26 C27 C28 C29 C31 C32: library part C, Manufacturer="TDK Corp", Manufacturer PartNum=C1005X5R1E104K050BC, Digikey ref=445-4964-1-ND
C4: Manufacturer=Kemet, Manufacturer PartNum=T495X477K010ATE100, Voltage=10V, Digikey ref=399-10524-1-ND
C5 C6: Manufacturer=Samsung, Manufacturer PartNum=CL05B221KB5NNNC, Digikey ref=1276-1531-1-ND
C7: library part C, Manufacturer=Samsung, Manufacturer PartNum=CL31A106KBHNNNE, rated voltage=50V, Digikey ref=1276-2876-1-ND
C9 C10 C11 C12 C16 C30: library part C
  C9 C10: Digikey ref=1276-1463-1-ND
  C11 C12: Digikey ref=490-5858-1-ND
  C16 C30: Digikey ref=490-5915-1-ND
C15: Manufacturer=Nichicon, Manufacturer PartNum=UVR1H101MPD1TD, rated voltage=50V, Digikey ref=493-5916-1-ND
D1 D5 D6 D20 D21 D22 D23 D24 D25 D26 D27 D28 D29: color_diam=green3mm, Manufacturer=Kingbright, Manufacturer PartNum=WP710A10LZGCK, Digikey ref=754-1915-ND, Type="GREEN, 2.65V/2mA/1100mcd/3mm"
D2 D3: color_diam=red5mm, Manufacturer="Cree Inc", Manufacturer PartNum=C503B-RCN-CW0Z0AA1, Digikey ref=C503B-RCN-CW0Z0AA1-ND, Type="RED, 2.1V/20mA/7500mcd/5mm"
D4 D8 D11 D12 D13 D14 D15 D16 D17 D18 D19: color_diam=blue3mm, Manufacturer=Wuerth, Manufacturer PartNum=151033BS03000, Digikey ref=732-5011-ND, Type="BLUE, 2.8V/20mA/3800mcd/3mm"
D7: color_diam=green5mm, Manufacturer=Kingbright, Manufacturer PartNum=WP7113LZGCK, Digikey ref=754-1920-ND, Type="GREEN, 2.65V/2mA/3000mcd/5mm"
D9 D32 D33: Manufacturer=STMicroelectronics, Manufacturer PartNum=STPS3L40UF, Digikey ref=497-8036-1-ND, IFmax=3A, Vf@IFmax=0.5V
D10: Manufacturer="ON Semi", Manufacturer PartNum=1N5354BG, Digikey ref=1N5354BGOS-ND, Vz=17V
D30 D31: color_diam=red3mm, Manufacturer=Wuerth, Manufacturer PartNum=151033RS03000, Digikey ref=732-5013-ND, Type="RED, 2V/20mA/2600mcd/3mm"
D34: "DIODE ZENER 3V 300MW SOD323", Manufacturer=NXP, Manufacturer PartNum=BZX384-C3V0,115, Digikey ref=568-8043-1-ND, Vz=3.0V
J1 J2 J3 J4 J5 J6 J7: "53047-0410 MOLEX", Manufacturer=Molex, Manufacturer PartNum=0530470410, Digikey ref=WM1733-ND
J8: "Header, 5-Pin", Digikey ref=S1113E-20-ND, LatestRevisionDate=17-Jul-2002, LatestRevisionNote="Re-released for DXP Platform.", Publisher="Altium Limited", status="SMD, right angle"
J9: "Header, 10-Pin, Dual row", LatestRevisionDate=17-Jul-2002, LatestRevisionNote="Re-released for DXP Platform.", Publisher="Altium Limited"
L1: "15µH Unshielded Wirewound Inductor 1.8A 114 mOhm Max Nonstandard", current=1.8A, Manufacturer="Bourns Inc", Manufacturer PartNum=SRN6028-150M, Digikey ref=SRN6028-150MCT-ND
L2: current=1A, Manufacturer="Taiyo Yuden", Manufacturer PartNum=BRC2012T1R0M, Digikey ref=587-2903-1-ND, Farnell ref=1904336
R1 R2 R3 R6 R7 R9: library part R, Manufacturer="Rohm Semi", Manufacturer PartNum=MCR01MRTF1001, Digikey ref=RHM1.00KCDCT-ND
R4 R5 R10 R26 R29 R30 R31 R32 R33 R34 R35 R36 R37 R38 R39 R40 R41 R42 R43 R44 R45: library part R
  R5 R10 R31 R32 R33 R34 R35 R36 R37 R38 R39 R40 R41 R42 R43 R44 R45: Digikey ref=RR05P10.0KDCT-ND
R8 R19 R20: library part R, Manufacturer=Yageo, Manufacturer PartNum=RC0402FR-073KL, Digikey ref=311-3KLRCT-ND
R11: library part R, Manufacturer=Panasonic, Manufacturer PartNum=ERJ-2RKF2702X, Digikey ref=P27.0KLCT-ND
R12 R14 R15 R16 R17 R18: library part R, Manufacturer=Panasonic, Manufacturer PartNum=ERJ-2RKF1002X, Digikey ref=P10.0KLCT-ND
R13: library part R, Manufacturer=Panasonic, Manufacturer PartNum=ERJ-2RKF3301X, Digikey ref=P3.30KLCT-ND
R21 R22 R23 R24 R25 R27 R28: library part R, Manufacturer=Yageo, Manufacturer PartNum=RC0402JR-07330RL, Digikey ref=311-330JRCT-ND
U1: Manufacturer="Vishay Semi", Digikey ref=TDSR1350-ND, Manufacturer PartNum=TDSR1350
U3 U6 U7: Manufacturer=NXP, Manufacturer PartNum=PCA9952TW/Q900,118, Digikey ref=568-10954-1-ND, Farnell ref=*, status=*
U4: "Buck Switching Regulator IC Positive Adjustable 0.8V 1 Output 2A 8-SOIC (0.154\", 3.90mm Width)", Manufacturer="Texas Instruments", Manufacturer PartNum=TPS54233DR, Digikey ref=296-23902-1-ND
U5: "16M-BIT [x 1 / x 2] CMOS SERIAL FLASH, 4KB Sector Erase", Manufacturer=Macronix, Manufacturer PartNum=MX25L1606EZUI-12G, Digikey ref=1092-1056-ND, Note1="Leave thermal pad floating"
U8 U9 U10: "IC LEVEL SHIFTER HEX 16-SOIC", Manufacturer="On Semi", Manufacturer PartNum=MC14504BDG, Digikey ref=MC14504BDGOS-ND
FB1: Digikey ref=490-3999-1-ND
SW1: Digikey ref=CKN10502CT-ND
U2: Digikey ref=497-11154-ND
U11: Digikey ref=497-13189-ND
X1: Digikey ref=887-2000-1-ND, Farnell ref="1892193 (US)"

## Via types
v1: diameter 0.7, hole 0.3, Top Layer to Bottom Layer, tented both sides, 122 vias
v2: diameter 0.6, hole 0.25, Top Layer to Bottom Layer, tented both sides, 18 vias
v3: diameter 0.7, hole 0.3, Top Layer to Bottom Layer, tented bottom, 1 vias

## Nets (pads, with @x,y where several pads share a name; then routed paths per layer and width w, separated by ;. In a path a pad name is that pad's centre, name@x,y a point inside that pad or via, vN(x,y) a via of type N, cw(c..) or ccw(c..) an arc to the next point about the centre after c; other vN are vias at no path point)
3V3: C2.1 C14.1 C16.1 C17.1 C18.1 C19.1 C20.1 C23.1 C24.1 C25.1 C27.1 C29.1 C31.2 D1.1 D2.1 D3.1 D4.1 D5.1 D6.1 D7.1 D8.1 D11.1 D12.1 D13.1 D14.1 D15.1 D16.1 D17.1 D18.1 D19.1 D20.1 D21.1 D22.1 D23.1 D24.1 D25.1 D26.1 D27.1 D28.1 D29.1 D30.1 D31.1 FB1.1 J3.4 L2.2 R1.2 R2.2 R3.2 R6.1 R7.2 R9.2 R14.1 R15.1 R16.1 R17.1 R18.1 U1.3 U1.8 U2.19 U2.32 U2.48 U2.64 U3.3 U3.25 U3.28 U5.8 U6.25 U6.28 U7.2 U7.25 U7.28 U8.16 U9.16 U10.1 U11.8 | length 88.7
  Top Layer w0.3: R16.1@63.5,36.476 R16.1@63.5,36.5
  Top Layer w0.35: 50.25,43.5 50.25,41.85 50.575,41.525 U6.25@51.6,41.525 ; v1(53.5,36.25) R18.1@53.5,37 R15.1@53.5,38 ; v1(55.5,45.25) C14.1@55.5,44.25 R17.1@55.5,43.25 55.25,43 55.25,41.75 55.55,41.45 U5.8@55.55,41.1 ; v1(61.5,34.5) C2.1@62.75,34.5 U3.28@63.925,34.5 ; R16.1@63.5,36.476 63.5,36.375 64.025,35.85 U3.28@64.025,34.6 64.025,33.868 64.468,33.425 ; U3.3@65.325,28.9 65.325,29.925 64.468,30.782 64.468,33.425 ; R14.1@66.5,36.5 66.5,36.44 65.975,35.915 U3.25@65.975,34.6 65.975,33.868 65.532,33.425 64.468,33.425 ; C31.2@104.25,24.75 104.305,24.695 U10.1@107.25,24.695 ; U7.25@124.35,34.275 v1@125.725,34.275
  Top Layer w0.5: R6.1@6.25,1.5 v1(6.25,2.25) ; v1(33.25,33) R2.2@35.25,33 ; v1(48.75,29) 49,29.25 C27.1@50,29.25 51.25,29.25 51.555,29.555 U8.16@51.555,30.75 ; U6.28@51.6,43.475 50.275,43.475 50.25,43.5 C23.1@50.25,44.75 50.5,45 v1(52,45) ; v1(97,32.25) R1.2@98,32.25 ; v1(103.25,24.75) C31.2@104.25,24.75 ; U7.2@118.65,35.575 120.175,35.575 v1(120.25,35.5) ; D26.1@124.154,39.305 123,38.151 C24.1@123,37.75 123,36.75 123.525,36.225 U7.28@124.35,36.225 ; R7.2@147.5,0.5 v1(148.5,0.5) ; R9.2@152.5,3 v1(152.5,4)
  Top Layer w1: L2.2@15.75,16.8 C25.1@18.15,16.8
  Bottom Layer w0.3: C20.1@53.75,26.75 U2.32@53.75,28.45
  Bottom Layer w0.35: U2.48@51.95,37.75 51.25,37.75 51,38 C19.1@51,39.5 51.25,39.5 51.75,40 51.75,43.5 52,43.75 v1(52,45) ; v1(61.5,34.5) 60.25,33.25 U2.19@60.25,28.45 C17.1@60.25,26.75 60.25,26.69 60.815,26.125 62.685,26.125 63.25,26.69 FB1.1@63.25,26.75 ; v1(116.075,29.1) 116.075,28.447 116.347,28.175 U11.8@117.48,28.175
  Bottom Layer w0.5: v1(48.25,25.75) 49.25,25.75 50.25,26.75 C16.1@52.75,26.75 C20.1@53.75,26.75 ; U2.64@61.35,39.5 C18.1@62.25,39.5 v1(62.25,38.9) ; U9.16@87.31,34 87.31,32.94 87.75,32.5 C29.1@89,32.5 v1(89,33.5)
  other v1: 17.25,15.75 15.5,18.25 17.25,18.25 19,18.25 17.25,19.75 19,19.75 19,21.5 125.75,34.25
3V3A: C21.1 FB1.2 U2.13 | length 6.4
  Bottom Layer w0.35: U2.13@63.05,31.75 62.128,31.75 61.75,31.372 61.75,29.75 62.4,29.1 62.4,27.9 C21.1@62.25,27.75 FB1.2@63.25,27.75
7S_A: U1.7 U3.20 | length 17.4
  Top Layer w0.35: U3.20@69.225,34.6 69.225,36.518 71.957,39.25 81.29,39.25 U1.7@82.905,40.864
7S_B: U1.6 U3.18 | length 18.2
  Top Layer w0.35: U3.18@70.525,34.6 70.525,35.82 73.455,38.75 83.33,38.75 U1.6@85.445,40.864
7S_C: U1.4 U3.13 | length 13
  Top Layer w0.35: U3.13@71.825,28.9 71.825,27.882 72.457,27.25 81.279,27.25 U1.4@82.905,25.624
7S_D: U1.2 U3.12 | length 8.6
  Top Layer w0.35: U3.12@71.175,28.9 71.175,27.825 72.25,26.75 76.699,26.75 U1.2@77.825,25.624
7S_DP: U1.5 U3.14 | length 14.8
  Top Layer w0.35: U3.14@72.475,28.9 72.475,28.025 72.75,27.75 83.319,27.75 U1.5@85.445,25.624
7S_E: U1.1 U3.11 | length 7.4
  Top Layer w0.35: U3.11@70.525,28.9 70.525,26.725 71.626,25.624 U1.1@75.285,25.624
7S_F: U1.9 U3.21 | length 13
  Top Layer w0.35: U3.21@68.575,34.6 68.575,36.575 71.75,39.75 76.71,39.75 U1.9@77.825,40.864
7S_G: U1.10 U3.22 | length 11.2
  Top Layer w0.35: U3.22@67.925,34.6 67.925,36.675 72.114,40.864 U1.10@75.285,40.864
BARGRAPH_LED1: D11.2 U6.14 | length 54.6
  Top Layer w0.35: D11.2@3.693,6.742 3.693,7.943 26.5,30.75 29.25,30.75 33.525,35.025 U6.14@45.9,35.025
BARGRAPH_LED2: D12.2 U6.13 | length 45.8
  Top Layer w0.35: D12.2@8.823,14.643 14.68,20.5 15.5,20.5 26.25,31.25 29,31.25 33.425,35.675 U6.13@45.9,35.675
BARGRAPH_LED3: D13.2 U6.12 | length 37.1
  Top Layer w0.35: D13.2@14.752,21.962 16.212,21.962 26,31.75 28.75,31.75 33.325,36.325 U6.12@45.9,36.325
BARGRAPH_LED4: D14.2 U6.11 | length 27.9
  Top Layer w0.35: D14.2@21.413,28.625 22.085,28.625 25.709,32.25 28.5,32.25 33.225,36.975 U6.11@45.9,36.975
BARGRAPH_LED5: D15.2 U6.9 | length 18.7
  Top Layer w0.35: D15.2@28.734,34.554 32.18,38 37.25,38 37.5,38.25 45.875,38.25 U6.9@45.9,38.275
BARGRAPH_LED6: D16.2 U6.8 | length 9.5
  Top Layer w0.35: D16.2@36.558,39.25 36.588,39.22 36.884,38.925 U6.8@45.9,38.925
BARGRAPH_LED7: D17.2 U6.7 | length 5.1
  Top Layer w0.35: D17.2@43.538,42.711 43.538,40.212 44.175,39.575 U6.7@45.9,39.575
BARGRAPH_LED8: D18.2 U6.6 | length 13.7
  Top Layer w0.35: U6.6@45.9,40.225 44.9,40.225 44.55,40.575 44.55,43.55 47.35,46.35 52.273,46.35 D18.2@52.553,46.069
BARGRAPH_LED9: D19.2 U6.23 | length 17.9
  Top Layer w0.35: U6.23@51.6,40.225 53.225,40.225 53.75,40.75 53.75,46.5 56.05,48.8 62.471,48.8 D19.2@62.551,48.88
BARGRAPH_LED10: D20.2 U6.22 | length 27.1
  Top Layer w0.35: U6.22@51.6,39.575 53.325,39.575 54.25,40.5 54.25,46.293 55.229,47.271 55.314,47.271 55.868,47.825 68.801,47.825 D20.2@70.957,49.981
BARGRAPH_LED11: D21.2 U6.21 | length 36.9
  Top Layer w0.35: U6.21@51.6,38.925 53.425,38.925 54.75,40.25 54.75,46 56.075,47.325 77.215,47.325 D21.2@80.365,50.474
BARGRAPH_LED12: D22.2 U7.9 | length 38.2
  Top Layer w0.35: D22.2@89.772,49.981 92.004,47.75 103.256,47.75 115.375,35.631 115.375,33.125 117.475,31.025 U7.9@118.65,31.025
BARGRAPH_LED13: D23.2 U7.8 | length 29.1
  Top Layer w0.35: D23.2@98.179,48.88 102.87,48.88 115.95,35.8 115.95,33.3 117.575,31.675 U7.8@118.65,31.675
BARGRAPH_LED14: D24.2 U7.7 | length 19.4
  Top Layer w0.35: D24.2@107.278,46.441 107.278,45.179 116.5,35.957 116.5,33.5 117.675,32.325 U7.7@118.65,32.325
BARGRAPH_LED15: D25.2 U7.6 | length 10.9
  Top Layer w0.35: D25.2@117.192,42.713 117.192,33.558 117.775,32.975 U7.6@118.65,32.975
BARGRAPH_LED16: D26.2 U7.21 | length 10.3
  Top Layer w0.35: U7.21@124.35,31.675 125.925,31.675 126.558,32.308 D26.2@126.558,40.121
BARGRAPH_LED17: D27.2 U7.20 | length 9.1
  Top Layer w0.35: U7.20@124.35,31.025 128.467,31.025 D27.2@131.996,34.554
BARGRAPH_LED18: D28.2 U7.18 | length 15.4
  Top Layer w0.35: U7.18@124.35,29.725 138.219,29.725 D28.2@139.317,28.627
BARGRAPH_LED19: D29.2 U7.17 | length 24.6
  Top Layer w0.35: U7.17@124.35,29.075 137.425,29.075 144.536,21.964 D29.2@145.978,21.964
BARGRAPH_LED20: D30.2 U7.16 | length 33.3
  Top Layer w0.35: U7.16@124.35,28.425 137.325,28.425 151.107,14.643 D30.2@151.906,14.643
BARGRAPH_LED21: D31.2 U7.15 | length 42.1
  Top Layer w0.35: U7.15@124.35,27.775 137.225,27.775 157.037,7.963 D31.2@157.037,6.744
BOOT0: R10.1 U2.60 | length 1.9
  Bottom Layer w0.35: U2.60@59.25,39.55 R10.1@59.25,41.5
BOOT1: R5.1 U2.28 | length 1.7
  Bottom Layer w0.3: R5.1@55.75,26.75 U2.28@55.75,28.45
BUT_N: R27.2 U2.9 | length 37.5
  Bottom Layer w0.3: U2.9@63.05,33.75 64.989,33.75 65.739,33 69.75,33 75.75,39 88.3,39 90.8,36.5 R27.2@96.75,36.5
BUT_SP: R25.2 U2.10 | length 37.7
  Bottom Layer w0.3: U2.10@63.05,33.25 64.75,33.25 65.5,32.5 70,32.5 76,38.5 88.164,38.5 91.164,35.5 R25.2@96.75,35.5
BUT_ST: D34.2 R4.2 R26.1 U2.25 | length 8.8
  Bottom Layer w0.25: R26.1@56.25,20.25 R4.2@57.25,21.25 57.25,22.36 D34.2@57.11,22.5 57.11,23.11 57.325,23.325 57.325,25.164 57.25,25.239 U2.25@57.25,28.45
CAME: J9.12 R35.2 U8.7 | length 32.5
  Top Layer w0.25: U8.7@59.175,24.75 59.175,23.575 59.95,22.8 61.081,22.8 62.822,21.059 78.941,21.059 80.25,19.75 80.25,18.079 J9.12@81.635,16.694 82.75,17.809 R35.2@82.75,21.25
Came_in: U2.34 U8.6 | length 12.9
  Top Layer w0.25: v2(56.05,32) 56,31.95 56,27.5 57.905,25.595 U8.6@57.905,24.75
  Bottom Layer w0.25: U2.34@51.95,30.75 55.25,30.75 56,31.5 56,31.95 v2(56.05,32)
EMBRAY: J9.10 R36.2 U8.5 | length 26.8
  Top Layer w0.25: U8.5@56.635,24.75 56.635,24.115 58.75,22 60.75,22 62.491,20.259 66.25,20.259 74.741,20.259 75.25,19.75 75.25,18.75 76,18 77.789,18 J9.10@79.095,16.694
Embray_in: U2.36 U8.4 | length 10.4
  Top Layer w0.25: v2(54.75,32) 54.75,26.25 55.365,25.635 U8.4@55.365,24.75
  Bottom Layer w0.25: U2.36@51.95,31.75 54.5,31.75 v2(54.75,32)
Gaz: J9.20 R31.2 U9.14 | length 24.6
  Top Layer w0.25: J9.20@91.795,16.694 93.194,16.694 R31.2@94.25,17.75
  Bottom Layer w0.25: U9.14@84.77,34 84.77,30.77 84.075,30.075 84.075,26.775 84.008,26.708 84.008,24.492 85,23.5 86.5,23.5 90.5,19.5 90.5,17.989 J9.20@91.795,16.694
Gaz_in: U2.11 U9.15 | length 27.6
  Bottom Layer w0.25: U2.11@63.05,32.75 64.649,32.75 65.399,32 70.25,32 75.75,37.5 83.5,37.5 86.04,34.96 U9.15@86.04,34